# EAGLE board numishnik (EAGLE 6.1)
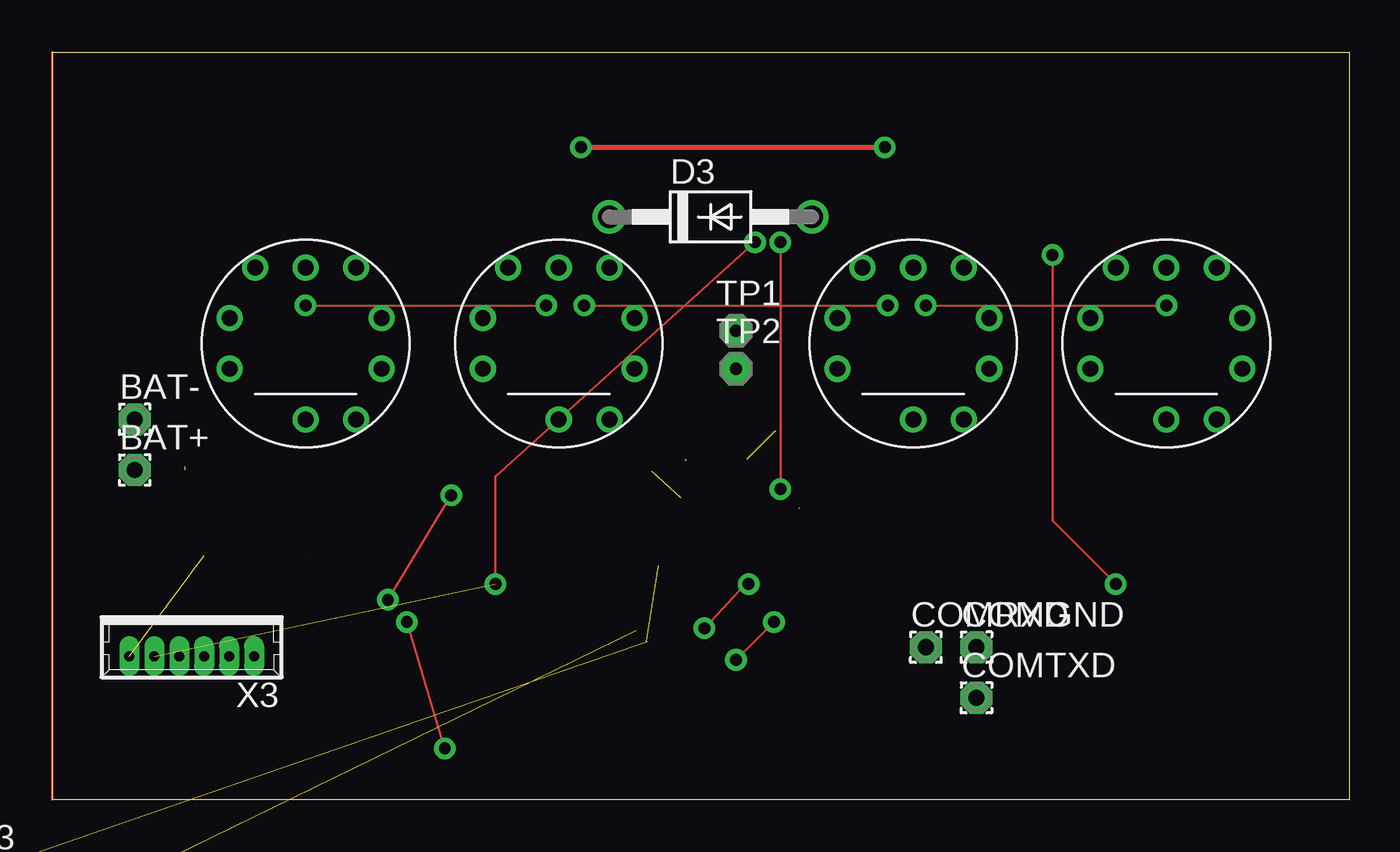
[diagram p0: board, top side]
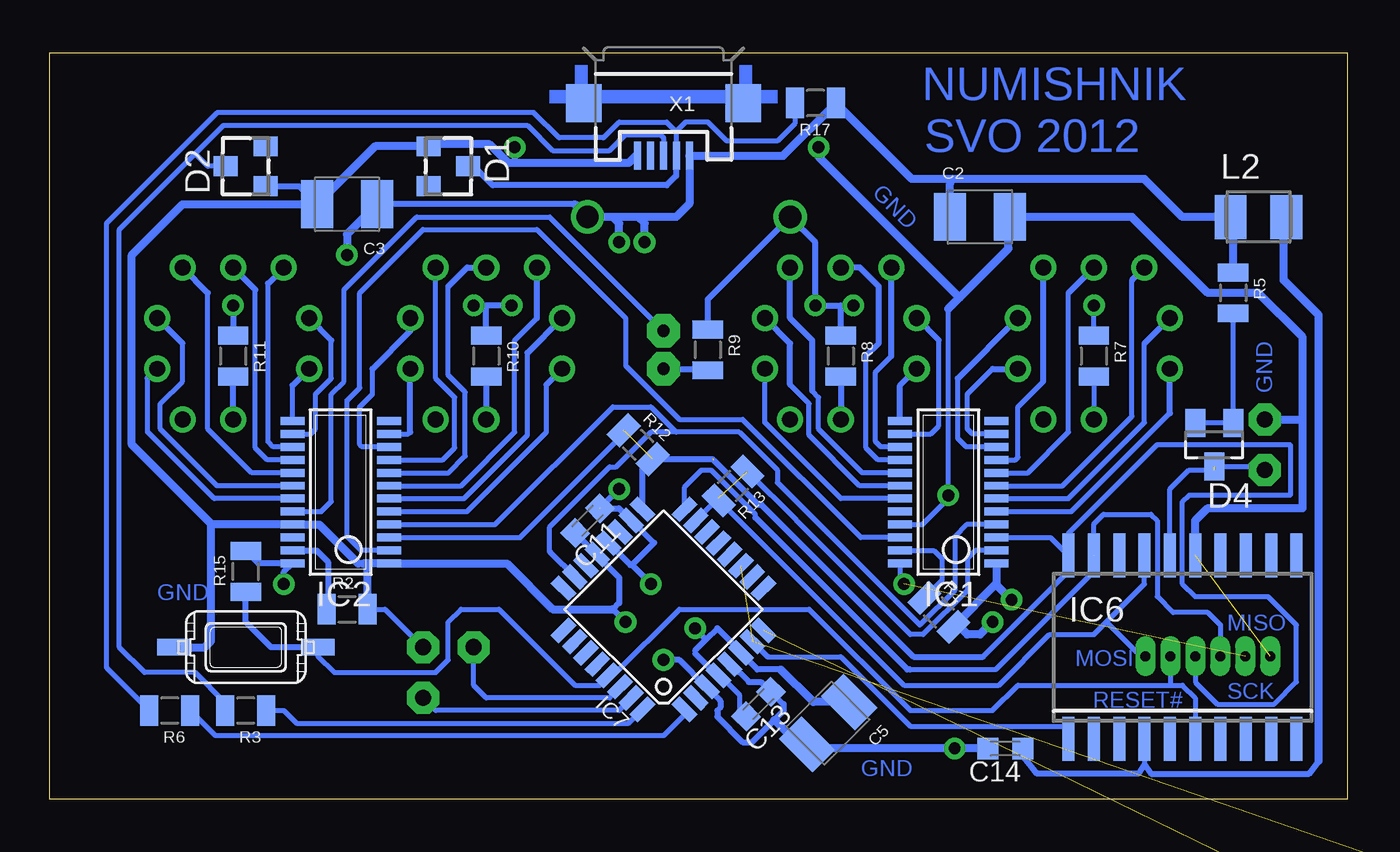
[diagram p1: board, bottom side, seen from below]

Size 65.08 x 37.45 mm. Coordinates in mm from the lower left corner, seen from the top.
Outline: 0,0 65.08,0 65.08,37.45 0,37.45 0,0
Copper layers (1*16): Top 0.035mm / dielectric 1.5mm / Bottom 0.035mm
Design rules: minimum track width 10mil, minimum drill 24mil, track to track 8mil, track to pad 8mil, pad to pad 8mil, via to via 8mil, smd to smd 8mil, copper to edge 40mil, drill to drill 8mil, minimum pad ring 10mil, minimum via ring 8mil, stop-mask expansion 4mil, vias tented up to drill 0mil, thermal gap 10mil

## Footprints (pad centres in the part's own frame; a part is rotated, then mirrored left to right if it is on the bottom)
1,6/0,8 = drill 0.813 pad 1.6 octagon: 1 0,0
SMC_B = smd 1.6 x 2.4: + -1.5,0; - 1.5,0
C0603K = smd 1.05 x 1.08: 1 -0.875,0; 2 0.875,0
TO236 = smd 1 x 1.2: A -1,-1; C 0,1; NC 1,-1
DO41-10 = drill 1.118: A 5.08,0; C -5.08,0
SOT23 = smd 1 x 1.4: 1 -0.95,-1.1; 2 0.95,-1.1; 3 0,1.1
SSOP24-150 = smd 0.4 x 1.2: 1 -3.575,-2.42; 2 -2.925,-2.42; 3 -2.275,-2.42; 4 -1.625,-2.42; 5 -0.975,-2.42; 6 -0.325,-2.42; 7 0.325,-2.42; 8 0.975,-2.42; 9 1.625,-2.42; 10 2.275,-2.42; 11 2.925,-2.42; 12 3.575,-2.42; 13 3.575,2.42; 14 2.925,2.42; 15 2.275,2.42; 16 1.625,2.42; 17 0.975,2.42; 18 0.325,2.42; 19 -0.325,2.42; 20 -0.975,2.42; 21 -1.625,2.42; 22 -2.275,2.42; 23 -2.925,2.42; 24 -3.575,2.42
SO-20DW = smd 0.6 x 2.2: 1 -5.715,-4.6; 2 -4.445,-4.6; 3 -3.175,-4.6; 4 -1.905,-4.6; 5 -0.635,-4.6; 6 0.635,-4.6; 7 1.905,-4.6; 8 3.175,-4.6; 9 4.445,-4.6; 10 5.715,-4.6; 11 5.715,4.6; 12 4.445,4.6; 13 3.175,4.6; 14 1.905,4.6; 15 0.635,4.6; 16 -0.635,4.6; 17 -1.905,4.6; 18 -3.175,4.6; 19 -4.445,4.6; 20 -5.715,4.6
TQFP32-08 = smd 1.27 x 0.559: 1 -4.293,2.8; 2 -4.293,2; 3 -4.293,1.2; 4 -4.293,0.4; 5 -4.293,-0.4; 6 -4.293,-1.2; 7 -4.293,-2; 8 -4.293,-2.8; 17 4.293,-2.8; 18 4.293,-2; 19 4.293,-1.2; 20 4.293,-0.4; 21 4.293,0.4; 22 4.293,1.2; 23 4.293,2; 24 4.293,2.8 | smd 0.559 x 1.27: 9 -2.8,-4.293; 10 -2,-4.293; 11 -1.2,-4.293; 12 -0.4,-4.293; 13 0.4,-4.293; 14 1.2,-4.293; 15 2,-4.293; 16 2.8,-4.293; 25 2.8,4.293; 26 2,4.293; 27 1.2,4.293; 28 0.4,4.293; 29 -0.4,4.293; 30 -1.2,4.293; 31 -2,4.293; 32 -2.8,4.293
L3230M = smd 1.6 x 2.2: 1 -1.4,0; 2 1.4,0
IV-16 = drill 0.8: 1 0,-3.81; 2 2.54,-3.81; 3 3.81,-1.27; 4 3.81,1.27; 5 2.54,3.81; 6 0,3.81; 7 -2.54,3.81; 8 -3.81,1.27; 9 -3.81,-1.27
R0805-SVO = smd 0.9 x 1.524: 1 -1.027,0; 2 1.027,0
SW_IT1181 = smd 1.676 x 0.813: P$1 -3.61,0; P$2 3.61,0
P1-13 = drill 0.61 pad 1.676 octagon: 1 0,0
USB-MICROB = smd 0.35 x 1.4: D+ 0,2.65; D- -0.65,2.65; GND 1.3,2.65; ID 0.65,2.65; VBUS -1.3,2.65 | smd 1.8 x 1.9: MT1 -4,0; MT2 4,0
53047-06 = drill 0.5 pad 0.698 long: 1 3.125,0.45; 2 1.875,0.45; 3 0.625,0.45; 4 -0.625,0.45; 5 -1.875,0.45; 6 -3.125,0.45

## Placement (x,y rotation side)
BAT+  [1,6/0,8]  4.13,16.51 0 top
BAT-  [1,6/0,8]  4.13,19.05 0 top
C2  10uF  [SMC_B]  18.41,29.21 0 bottom
C3  10uF  [SMC_B]  50.16,29.84 180 bottom
C5  10uF  [SMC_B]  26.04,3.81 225 bottom
C11  100nF  [C0603K]  38.1,13.97 225 bottom
C13  100nF  [C0603K]  29.53,4.76 225 bottom
C14  100nF  [C0603K]  17.14,2.54 180 bottom
COMGND  [1,6/0,8]  46.35,7.62 0 top
COMRXD  [1,6/0,8]  43.81,7.62 0 top
COMTXD  [1,6/0,8]  46.35,5.08 0 top
D1  BZX84C 3.3V  [TO236]  45.09,31.75 270 bottom
D2  BZX84C 3.3V  [TO236]  55.24,31.75 90 bottom
D3  1N4004  [DO41-10]  33.02,29.21 0 top
D4  BAT54C  [SOT23]  6.67,17.78 180 bottom
IC1  MBI5026GP  [SSOP24-150]  20,15.4 90 bottom
IC2  MBI5026GP  [SSOP24-150]  50.48,15.4 90 bottom
IC6  DS3234  [SO-20DW]  8.26,7.62 0 bottom
IC7  MEGA8-AI  [TQFP32-08]  34.29,9.53 135 bottom
L2  [L3230M]  4.45,29.21 0 bottom
N1  IV-16  [IV-16]  12.7,22.86 0 top
N2  IV-16  [IV-16]  25.4,22.86 0 top
N3  IV-16  [IV-16]  43.18,22.86 0 top
N4  IV-16  [IV-16]  55.88,22.86 0 top
R1  820  [R0805-SVO]  20.48,9.37 315 bottom
R2  820  [R0805-SVO]  50.16,9.53 0 bottom
R3  100  [R0805-SVO]  55.24,4.45 180 bottom
R5  10K  [R0805-SVO]  5.71,25.4 270 bottom
R6  100  [R0805-SVO]  59.05,4.45 180 bottom
R7  10  [R0805-SVO]  12.7,22.23 270 bottom
R8  10  [R0805-SVO]  25.4,22.23 270 bottom
R9  100  [R0805-SVO]  32.07,22.54 270 bottom
R10  10  [R0805-SVO]  43.18,22.23 270 bottom
R11  10  [R0805-SVO]  55.88,22.23 270 bottom
R12  000  [R0805-SVO]  35.56,17.78 315 bottom
R13  000  [R0805-SVO]  30.8,15.72 225 bottom
R15  10K  [R0805-SVO]  55.24,11.43 90 bottom
R17  2K2  [R0805-SVO]  26.67,34.92 180 bottom
SW1  BUTTON-IT_1181  [SW_IT1181]  55.24,7.62 0 bottom
TP1  TPSPAD1-13  [P1-13]  34.29,23.5 0 top
TP2  TPSPAD1-13  [P1-13]  34.29,21.59 0 top
TP3  TPSPAD1-13  [P1-13]  -4.13,-3.81 0 top  (outside the outline)
TP4  TPSPAD1-13  [P1-13]  -4.13,-7.81 0 top  (outside the outline)
X1  USB-MICROB  [USB-MICROB]  34.29,34.92 180 bottom
X3  53047-06  [53047-06]  6.99,7.62 180 top

## Library data of the parts
BAT+ BAT- COMGND COMRXD COMTXD = wirepad
C2 C3 C5 C11 C13 C14 L2 R1-R3 R5-R13 R15 R17 = rcl
D1-D4 = diode
IC1 IC2 = 0-macroblock
IC6 = 0-ds3234
IC7 = atmel
N1-N4 = 0-nixies-russian
SW1 TP1-TP4 = 0-svo
X1 = SparkFun
X3 = con-molex

## Nets
+5V: C2.+ C3.+ C5.+ C11.1 C13.2 D3.A IC1.24 IC2.24 IC7.4 IC7.6 IC7.18 IC7.20 L2.1 R5.1 R15.2 R17.1 X1.VBUS X3.2
BTN+: IC7.28
BTNSET: IC7.27
D+: IC7.32 R3.1
D-: IC7.1 R6.1
DOT: IC2.20 TP1.1
GND: BAT-.1 C2.- C3.- C5.- C11.2 C13.1 C14.2 COMGND.1 D1.A D2.A IC1.1 IC1.21 IC2.1 IC2.21 IC6.15 IC7.3 IC7.5 IC7.21 R1.2 R2.2 SW1.P$1 X1.GND X3.1
LE: IC1.4 IC2.4 IC7.23
MISO: IC6.19 IC7.16 X3.3
MOSI: IC1.2 IC6.17 IC7.15 R13.1 R13.2 X3.6
MOSI#2: IC1.22 IC2.2
N$1: IC7.7 TP3.1
N$2: R9.2 TP2.1
N$3: N1.1 R7.2
N$4: IC1.23 R1.1
N$5: IC2.23 R2.1
N$6: IC6.18
N$7: D1.C R6.2 R17.2 X1.D-
N$8: D2.C R3.2 X1.D+
N$9: BAT+.1 D4.3 IC6.16
N$10: D4.1 D4.2 R5.2
N$11: N2.1 R8.2
N$12: N3.1 R10.2
N$13: N4.1 R11.2
N$14: D3.C R7.1 R8.1 R9.1 R10.1 R11.1
RESET#: IC6.6 IC7.29 R15.1 SW1.P$2 X3.5
RTCINT: IC6.5
RTCSEL#: IC6.1 IC7.11
RTCVCC: C14.1 IC6.4 L2.2
RXD: COMRXD.1 IC7.30
SCK: IC1.3 IC2.3 IC6.20 IC7.17 R12.1 R12.2 X3.4
SEG0: IC1.11 N1.3
SEG1: IC1.10 N1.4
SEG2: IC1.9 N1.5
SEG3: IC1.8 N1.6
SEG4: IC1.7 N1.7
SEG5: IC1.6 N1.8
SEG6: IC1.5 N1.9
SEG7: IC1.19 N2.3
SEG8: IC1.18 N2.4
SEG9: IC1.17 N2.5
SEG10: IC1.16 N2.6
SEG11: IC1.15 N2.7
SEG12: IC1.14 N2.8
SEG13: IC1.13 N2.9
SEG14: IC2.11 N3.3
SEG15: IC2.10 N3.4
SEG16: IC2.9 N3.5
SEG17: IC2.8 N3.6
SEG18: IC2.7 N3.7
SEG19: IC2.6 N3.8
SEG20: IC2.5 N3.9
SEG21: IC2.19 N4.3
SEG22: IC2.18 N4.4
SEG23: IC2.17 N4.5
SEG24: IC2.16 N4.6
SEG25: IC2.15 N4.7
SEG26: IC2.14 N4.8
SEG27: IC2.13 N4.9
TXD: COMTXD.1 IC7.31
XTAL2: IC7.8 TP4.1

## Tracks (layer width: path | path; a pad name or v marks a point on that pad's centre or on a via)
+5V  (via drill 0.6)  (2 unrouted)
  Top 0.1: v34.92,10.79 34.77,10.79 v32.7,8.57 | v36.51,27.94 v36.51,15.56 | v50.16,27.3 50.16,13.97 v53.34,10.79 | v22.23,10.79 22.23,16.19 v35.24,27.94
  Bottom 0.254: IC7.18 35.88,13.97 | 35.88,11.75 35.95,11.75 | C13.2 30.48,4.48 30.48,5.24 31.45,6.21 IC7.4 31.68,6.35 31.75,6.35 31.59,6.19 | IC7.6 30.41,7.39 | 32.7,7.46 32.7,7.3 | 5.71,29.08 L2.1 | 19.91,30.89 19.68,31.11 | v32.7,8.57 32.54,8.41 | IC1.24 22.42,10.99 v22.23,10.79
  Bottom 0.305: 35.88,13.97 34.77,12.86 35.88,11.75 v34.92,10.79 | 35.95,11.75 IC7.20 | C11.1 36.52,14.59 IC7.18 | 30.41,7.39 31.59,8.57 32.15,8.02 | 32.15,8.02 32.7,7.46 | 32.7,7.3 31.75,6.35 | 28.42,6.51 29.58,6.51 IC7.6 | 38.73,29.84 C3.+ | R15.2 54.61,11.82 IC2.24 53.34,11.39 v53.34,10.79 | 32.54,8.41 32.15,8.02 | v36.51,15.56 37.47,14.61
  Bottom 0.406: C5.+ 26.78,4.87 28.42,6.51 | 38.73,29.84 D3.A 36.83,29.21 | R5.1 5.71,29.08 | L2.1 8.26,29.21 10.16,31.11 19.68,31.11 21.83,31.11 R17.1 28.29,32.27 X1.VBUS 32.99,29.88 33.66,29.21 35.56,29.21 | C2.+ 19.91,30.89 | C3.+ 50.16,28.34 v50.16,27.3 | 35.56,29.21 36.83,29.21 | v35.24,27.94 35.24,28.89 35.56,29.21 | v36.51,27.94 36.51,28.89 36.83,29.21
D+
  Bottom 0.254: R3.1 53.34,4.45 52.7,3.81 36.05,3.81 IC7.32
D-
  Bottom 0.254: IC7.1 33.23,4.23 34.29,3.17 56.76,3.17 R6.1
DOT
  Bottom 0.254: IC2.20 51.46,14.42 50.96,14.92 50.96,20.32 50.32,20.95 50.32,25.56 46.67,29.21 40.01,29.21 TP1.1
GND  (via drill 0.6)  (1 unrouted)
  Top 0.1: v19.68,2.54 v17.78,8.89 | v16.83,10 v20,15.24 | v36.2,8.89 v34.29,6.99
  Top 0.254: v26.51,32.7 v41.75,32.7
  Bottom 0.254: 30.97,6.84 IC7.5 30.9,6.77 | 37.65,12.28 IC7.21 37.61,12.21 | 32.1,5.59 IC7.3 32.15,5.64 | 31.43,4.6 31.59,4.45 | 28.26,4.76 28.29,4.76 | 27.51,2.75 C5.- 26.89,2.54 | 49.61,11.82 49.37,11.82 49.14,11.59 | IC1.1 17.58,10.81 | X1.GND 35.67,32.27 | 45.97,32.86 D1.A | C3.- 51.44,29.84 | 56.99,13.74 56.95,13.77 | IC1.21 21.31,13.77 20,15.08 v20,15.24 20,24.61 | 16.99,29.14 C2.- | R1.2 19.75,8.82 19.68,8.89 | R2.2 48.26,9.53 COMGND.1
  Bottom 0.305: 37.65,12.28 C11.2 | 30.9,6.77 30,5.87 29.4,5.87 C13.1 28.29,4.76 | 32.1,5.59 31.43,4.92 31.43,4.6 | 31.59,4.45 31.59,4.13 30.32,2.86 29.84,2.86 28.73,3.97 28.26,4.45 28.26,4.76 | D2.A 52.57,30.75 C3.- | v41.75,32.7 41.75,31.91 | 32.15,5.64 33.5,6.99 v34.29,6.99 | v36.2,8.89 36.83,9.53 36.51,9.84 36.51,11.11 37.61,12.21
  Bottom 0.406: 27.51,2.75 28.73,3.97 | 36.83,9.53 39.85,9.53 42.15,11.82 IC2.1 49.37,11.82 | 49.61,11.82 51.56,13.77 IC2.21 56.95,13.77 60.96,17.78 60.96,27.3 58.42,29.84 C3.- 48.76,32.75 D1.A | R2.2 49.14,11.59 | 17.58,10.81 R1.2 | 35.67,32.27 36.04,31.91 41.75,31.91 42.07,31.91 43.02,32.86 45.97,32.86 | SW1.P$1 57.31,7.62 56.99,7.94 56.99,13.74 | 26.89,2.54 v19.68,2.54 C14.2 | 20,24.61 19.45,25.16 | 19.45,25.16 16.99,27.62 16.99,29.14 | C2.- 10.79,29.21 6.99,25.4 4.45,25.4 2.22,23.18 2.22,19.05 | IC6.15 7.62,13.97 6.99,14.61 2.22,14.61 2.22,19.05 | v17.78,8.89 18.41,8.26 19.05,8.26 19.68,8.89 | IC1.1 17.58,10.76 v16.83,10 | 19.45,25.16 26.51,32.23 v26.51,32.7 | BAT-.1 2.22,19.05
LE
  Bottom 0.254: 33.66,18.41 30.48,18.41 28.57,16.51 28.57,15.88 21.43,8.73 19.68,10.48 19.68,13.18 19.09,13.77 IC1.4 | 33.66,18.41 34.92,18.41 36.67,16.67 36.99,16.67 40.01,13.65 40.01,12.38 39.98,12.38 | IC2.4 42.74,13.77 36.83,19.68 34.92,19.68 33.66,18.41
  Bottom 0.305: 39.98,12.38 IC7.23
MISO  (1 unrouted)
  Bottom 0.254: IC7.16 33.23,15.66 32.38,16.51 31.91,16.51 29.69,14.29 29.69,14.13 | 21.91,6.51 17.62,6.51 12.7,11.43 IC6.19 | IC6.19 12.54,12.38 | IC6.19 12.7,13.81 12.22,14.29 9.84,14.29 9.53,13.97 9.53,10.16 8.73,9.37 6.99,9.37 6.35,8.73 X3.3
  Bottom 0.305: 21.91,6.51 22.07,6.51 29.69,14.13
MOSI  (1 unrouted)
  Bottom 0.254: R13.1 27.6,13.97 27.6,13.95 21.91,8.26 21.27,8.26 19.05,10.48 19.05,12.06 18.64,12.47 IC1.2 | R13.2 31.52,15.01 | IC7.15 31.52,15.12 31.52,15.01 | 31.52,15.01 22.23,5.71 17.46,5.71 14.92,8.26 12.7,8.26 12.06,8.89 | 12.06,8.89 10.16,10.79 IC6.17 | X3.6 10.35,7.17 12.06,8.89
MOSI#2
  Bottom 0.254: IC1.22 24.39,13.12 30.32,19.05 33.5,19.05 36.2,21.75 36.2,24.13 40.64,28.57 46.35,28.57 49.53,25.4 49.53,20.64 50.16,20 50.16,13.18 49.46,12.47 IC2.2
N$1  (1 unrouted)
N$2
  Bottom 0.254: 32.14,21.59 R9.2
  Bottom 0.305: TP2.1 32.14,21.59
N$3
  Bottom 0.254: R7.2 N1.1
N$4
  Bottom 0.254: IC1.23 20.73,12.47 20.32,12.06 20.32,10.98 R1.1
N$5
  Bottom 0.254: 51.12,9.6 R2.1
  Bottom 0.305: IC2.23 51.69,12.47 51.12,11.91 51.12,9.6
N$7
  Bottom 0.254: 33.66,33.5 34.13,33.97 36.51,33.97 37.31,33.18 39.53,33.18 40.8,34.45 56.67,34.45 62.23,28.89 62.23,6.59 R6.2 | 33.66,33.5 33.66,32.26 X1.D- | R17.2 27.7,33.9 28.57,33.02 31.11,33.02 32.07,33.97 33.18,33.97 33.66,33.5 | D1.C 43.81,31.75
  Bottom 0.305: 33.66,32.26 33.66,31.27 34.13,30.8 42.86,30.8 43.81,31.75
N$8
  Bottom 0.254: R3.2 56.27,4.84 57.78,6.35 60.33,6.35 61.59,7.62 61.59,28.57 57.78,32.38 | X1.D+ 34.29,33.18 34.45,33.34 36.2,33.34 36.99,32.54 39.85,32.54 41.12,33.81 56.36,33.81 57.78,32.38 | D2.C 57.15,31.75 57.78,32.38
N$9  (1 unrouted)
  Bottom 0.254: 6.67,16.51 7.94,16.51 8.89,15.56 IC6.16 | D4.3 4.3,16.68 BAT+.1
N$10
  Bottom 0.254: R5.2 D4.1 D4.2
N$11
  Bottom 0.305: R8.2 N2.1
N$12
  Bottom 0.305: R10.2 N3.1
N$13
  Bottom 0.305: N4.1 R11.2
N$14  (via drill 0.6)
  Top 0.1: v12.7,24.77 v24.77,24.77 | v26.67,24.77 v41.91,24.77 | v43.81,24.77 v55.88,24.77
  Bottom 0.254: R7.1 v12.7,24.77 | 25.4,24.77 v26.67,24.77
  Bottom 0.305: v55.88,24.77 R11.1 | R8.1 25.4,24.77 | v24.77,24.77 v26.67,24.77 26.67,27.94 D3.C 32.07,25.08 R9.1 | R10.1 43.18,24.77 | 43.18,24.77 v43.81,24.77 | v41.91,24.77 43.18,24.77
RESET#
  Bottom 0.254: 8.89,5.71 16.51,5.71 17.78,4.45 21.91,4.45 26.99,9.53 33.5,9.53 36.81,6.21 IC7.29 37.5,5.75 | 8.89,5.71 8.26,5.71 7.62,5.08 IC6.6 | X3.5 8.86,5.75 8.89,5.71 | 37.53,5.71 37.5,5.75 | 37.5,5.75 37.47,5.71 38.73,5.71 42.55,9.53 44.45,9.53 45.09,8.89 45.09,6.99 45.72,6.35 50.8,6.35 51.63,7.18 SW1.P$2
  Bottom 0.305: SW1.P$2 53.98,7.62 55.24,8.89 R15.1
RTCSEL#  (1 unrouted)
  Bottom 0.254: IC6.1 13.97,3.81 14.13,3.65 21.91,3.65 25.4,7.14 29.05,7.14
  Bottom 0.305: 29.81,7.9 29.05,7.14
RTCVCC
  Bottom 0.254: 16.19,2.06 16.19,2.46 C14.1 | IC6.4 10.16,1.75 | L2.2 3.17,29.21
  Bottom 0.305: 16.19,2.06 15.56,1.27 10.48,1.27 10.16,1.75 9.84,1.27 1.91,1.27 1.43,1.91
  Bottom 0.406: 1.43,1.91 1.43,24.29 3.17,26.04 3.17,29.21
RXD
  Bottom 0.254: IC7.30 36.48,5.59 36.99,5.08 43.18,5.08 43.81,5.71 COMRXD.1
SCK  (3 unrouted)
  Bottom 0.254: 35.34,16.54 R12.2 | IC2.3 41.49,13.12 36.2,18.41 | IC1.3 14.87,13.12 IC6.20 | 18.26,7.14 13.97,11.43 IC6.20 | IC6.20 13.97,13.34 9.53,17.78 2.86,17.78 2.86,15.24 7.94,15.24 8.26,14.92 8.26,10.79 7.62,10.16 3.97,10.16 2.54,8.73 2.54,5.87 3.65,4.76 6.51,4.76 7.61,5.86 X3.4
  Bottom 0.305: IC7.17 35.34,16.54 | R12.2 31.82,17.05 | 18.26,7.14 21.75,7.14 29.37,14.76 29.53,14.76 31.75,16.99
SEG0
  Bottom 0.254: IC1.11 18.8,18.32 19.05,18.57 19.05,20.32 17.78,21.59
  Bottom 0.305: 17.78,21.59 N1.3
SEG1
  Bottom 0.254: IC1.10 19.1,17.67 19.53,18.1 19.53,21.11
  Bottom 0.305: 19.53,21.11 N1.4
SEG2
  Bottom 0.254: IC1.9 16.63,17.02 16.51,17.14 16.51,19.68 15.24,20.95
  Bottom 0.305: 15.24,20.95 N1.5
SEG3
  Bottom 0.254: IC1.8 16.01,16.37 13.97,18.41 13.97,25.4
  Bottom 0.305: 13.97,25.4 N1.6
SEG4
  Bottom 0.254: IC1.7 14.28,15.72 10.79,19.21 10.79,26.04
  Bottom 0.305: 10.79,26.04 N1.7
SEG5
  Bottom 0.254: IC1.6 13.98,15.07 10.16,18.89 10.16,22.86
  Bottom 0.305: 10.16,22.86 N1.8
SEG6
  Bottom 0.254: IC1.5 13.83,14.42 8.89,19.37
  Bottom 0.305: 8.89,19.37 N1.9
SEG7
  Bottom 0.254: IC1.19 25.39,15.07 29.21,18.89 29.21,21.43 29.37,21.59 N2.3
SEG8
  Bottom 0.254: IC1.18 24.45,15.72 26.99,18.26 26.99,19.84 27.94,20.8
  Bottom 0.305: 27.94,20.8 27.94,22.86 N2.4
SEG9
  Bottom 0.254: IC1.17 24.31,16.37 26.51,18.57 26.51,20.16 26.83,20.48
  Bottom 0.305: 26.83,20.48 26.83,23.02 27.94,24.13 N2.5
SEG10
  Bottom 0.254: IC1.16 23.53,17.02 24.13,17.62 24.13,22.23
  Bottom 0.305: 24.13,22.23 23.5,22.86 23.5,25.72 24.45,26.67 N2.6
SEG11
  Bottom 0.254: IC1.15 23.39,17.67 23.65,17.94 23.65,21.43 22.86,22.23
  Bottom 0.305: 22.86,22.23 N2.7
SEG12
  Bottom 0.254: IC1.14 20.89,18.32 20.48,18.73 20.48,23.02
  Bottom 0.305: 20.48,23.02 N2.8
SEG13
  Bottom 0.305: IC1.13 22.42,20.76 N2.9
SEG14
  Bottom 0.254: IC2.11 47.08,18.32 46.99,18.41
  Bottom 0.305: 46.99,18.41 N3.3
SEG15
  Bottom 0.254: IC2.10 49.42,17.67 49.53,17.78 49.53,19.68 48.9,20.32 48.9,21.59
  Bottom 0.305: N3.4 46.99,23.5 48.9,21.59
SEG16
  Bottom 0.254: N3.5 45.72,21.11 44.77,20.16 44.77,17.62 45.37,17.02 IC2.9
SEG17
  Bottom 0.254: IC2.8 45.06,16.37 44.23,17.2 44.23,20.42 45.09,21.27 45.09,25.72
  Bottom 0.305: 45.09,25.72 44.13,26.67 N3.6
SEG18
  Bottom 0.254: IC2.7 44.44,15.72 41.75,18.41 41.75,23.02 40.64,24.13
  Bottom 0.305: 40.64,24.13 N3.7
SEG19
  Bottom 0.254: IC2.6 44.3,15.07 41.12,18.26 41.12,22.38
  Bottom 0.305: 41.12,22.38 N3.8
SEG20
  Bottom 0.254: IC2.5 44.16,14.42 40.16,18.41 40.16,20.8
  Bottom 0.305: 40.16,20.8 N3.9
SEG21
  Bottom 0.254: IC2.19 56.83,15.07 60.17,18.41 60.17,21.11
  Bottom 0.305: 60.17,21.11 N4.3
SEG22
  Bottom 0.254: IC2.18 56.68,15.72 59.53,18.57 59.53,19.84 58.42,20.95 58.42,22.86
  Bottom 0.305: 58.42,22.86 N4.4
SEG23
  Bottom 0.254: IC2.17 54.95,16.37 57.15,18.57 57.15,25.4
  Bottom 0.305: 57.15,25.4 N4.5
SEG24
  Bottom 0.254: IC2.16 54.17,17.02 54.77,17.62 54.77,25.56
  Bottom 0.305: 54.77,25.56 N4.6
SEG25
  Bottom 0.254: IC2.15 53.87,17.67 54.13,17.94 54.13,25.88
  Bottom 0.305: 54.13,25.88 N4.7
SEG26
  Bottom 0.254: IC2.14 52,18.32 51.75,18.57 51.75,20.32 50.96,21.11 50.96,23.02
  Bottom 0.305: 50.96,23.02 N4.8
SEG27
  Bottom 0.254: IC2.13 52.9,20.76
  Bottom 0.305: 52.9,20.76 N4.9
TXD
  Bottom 0.254: IC7.31 35.91,5.05 36.51,4.45 45.72,4.45 COMTXD.1
XTAL2  (1 unrouted)
(copper drawn outside any net)
  shapes: Bottom area x5, Top area x1

## Text on the board
Bottom: NUMISHNIK | SVO 2012 | GND | GND | GND | MISO | MOSI | SCK | RESET# | GND
201bmp: /Users/svo/eagle/xface-crop.bmp